# Altium PCB wireTest.PcbDoc (part 1 of 2)
Units mm, origin at the board's own origin, x right, y up, seen from the top; angles counter-clockwise.
Board outline 121.22 x 130.26 mm, 2 copper layers (Top Layer, Bottom Layer); 157 components, 144 nets, 513 pads, 186 vias.
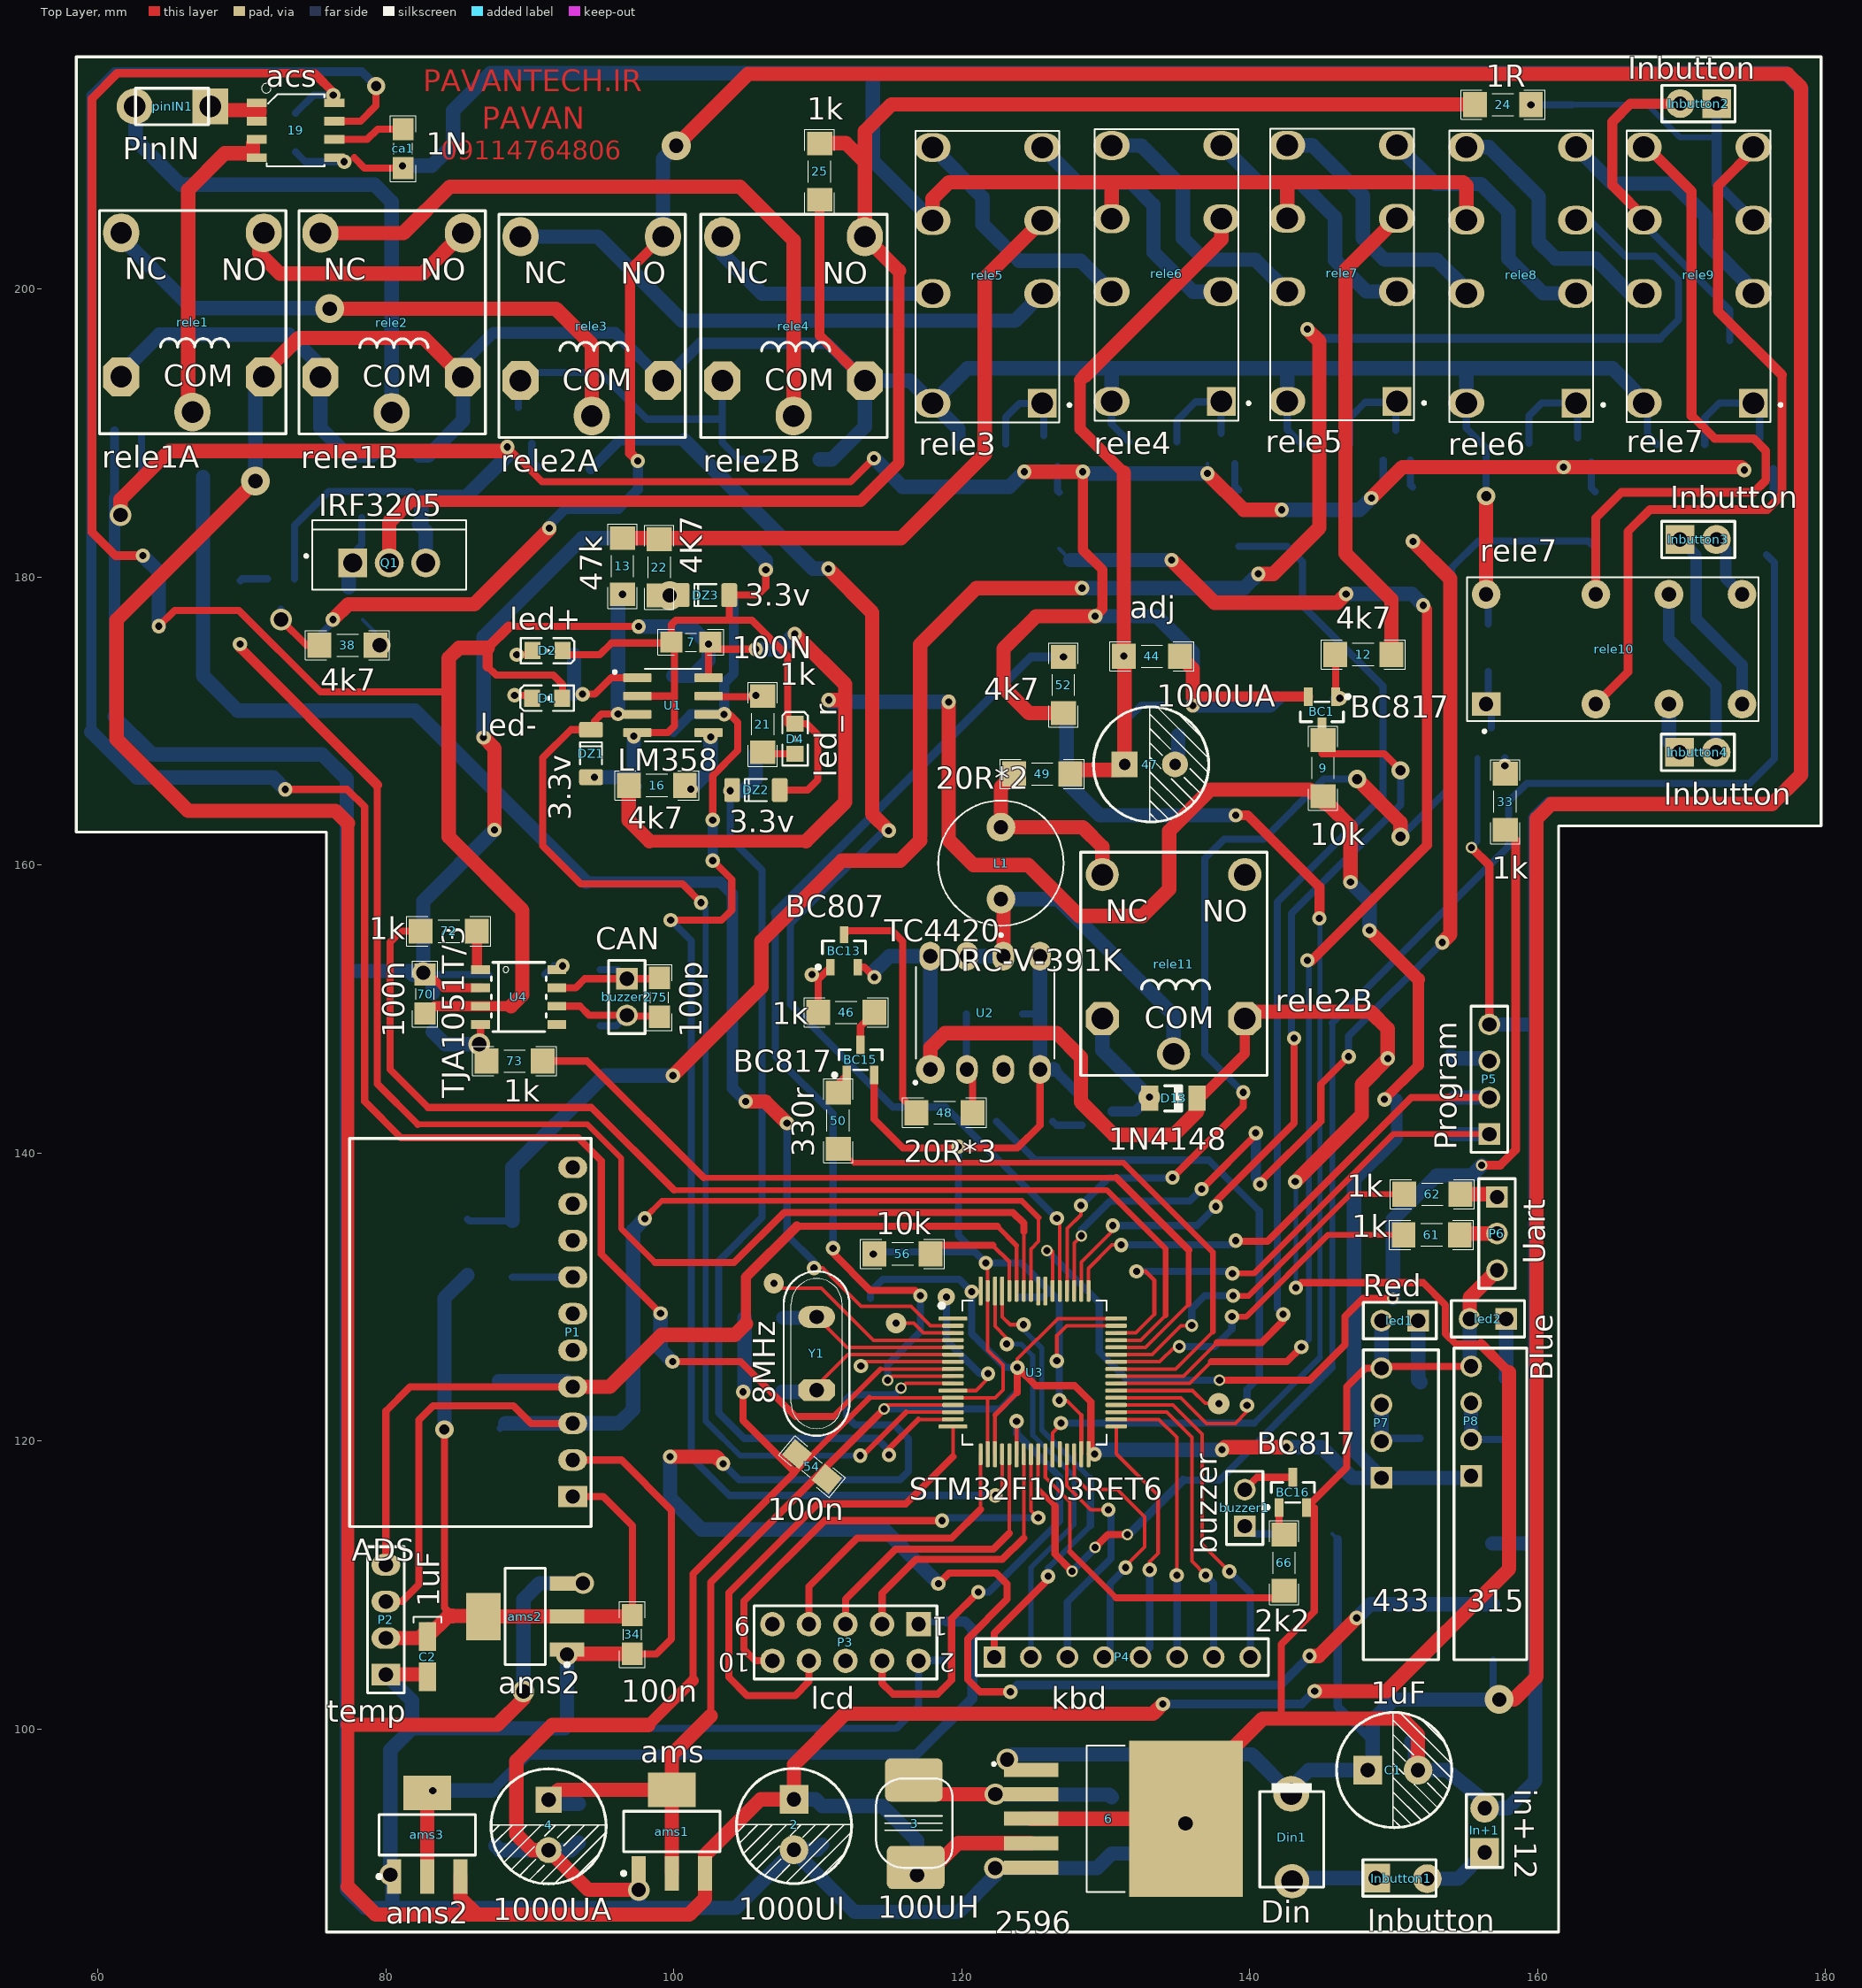
[diagram p0: Top Layer view]
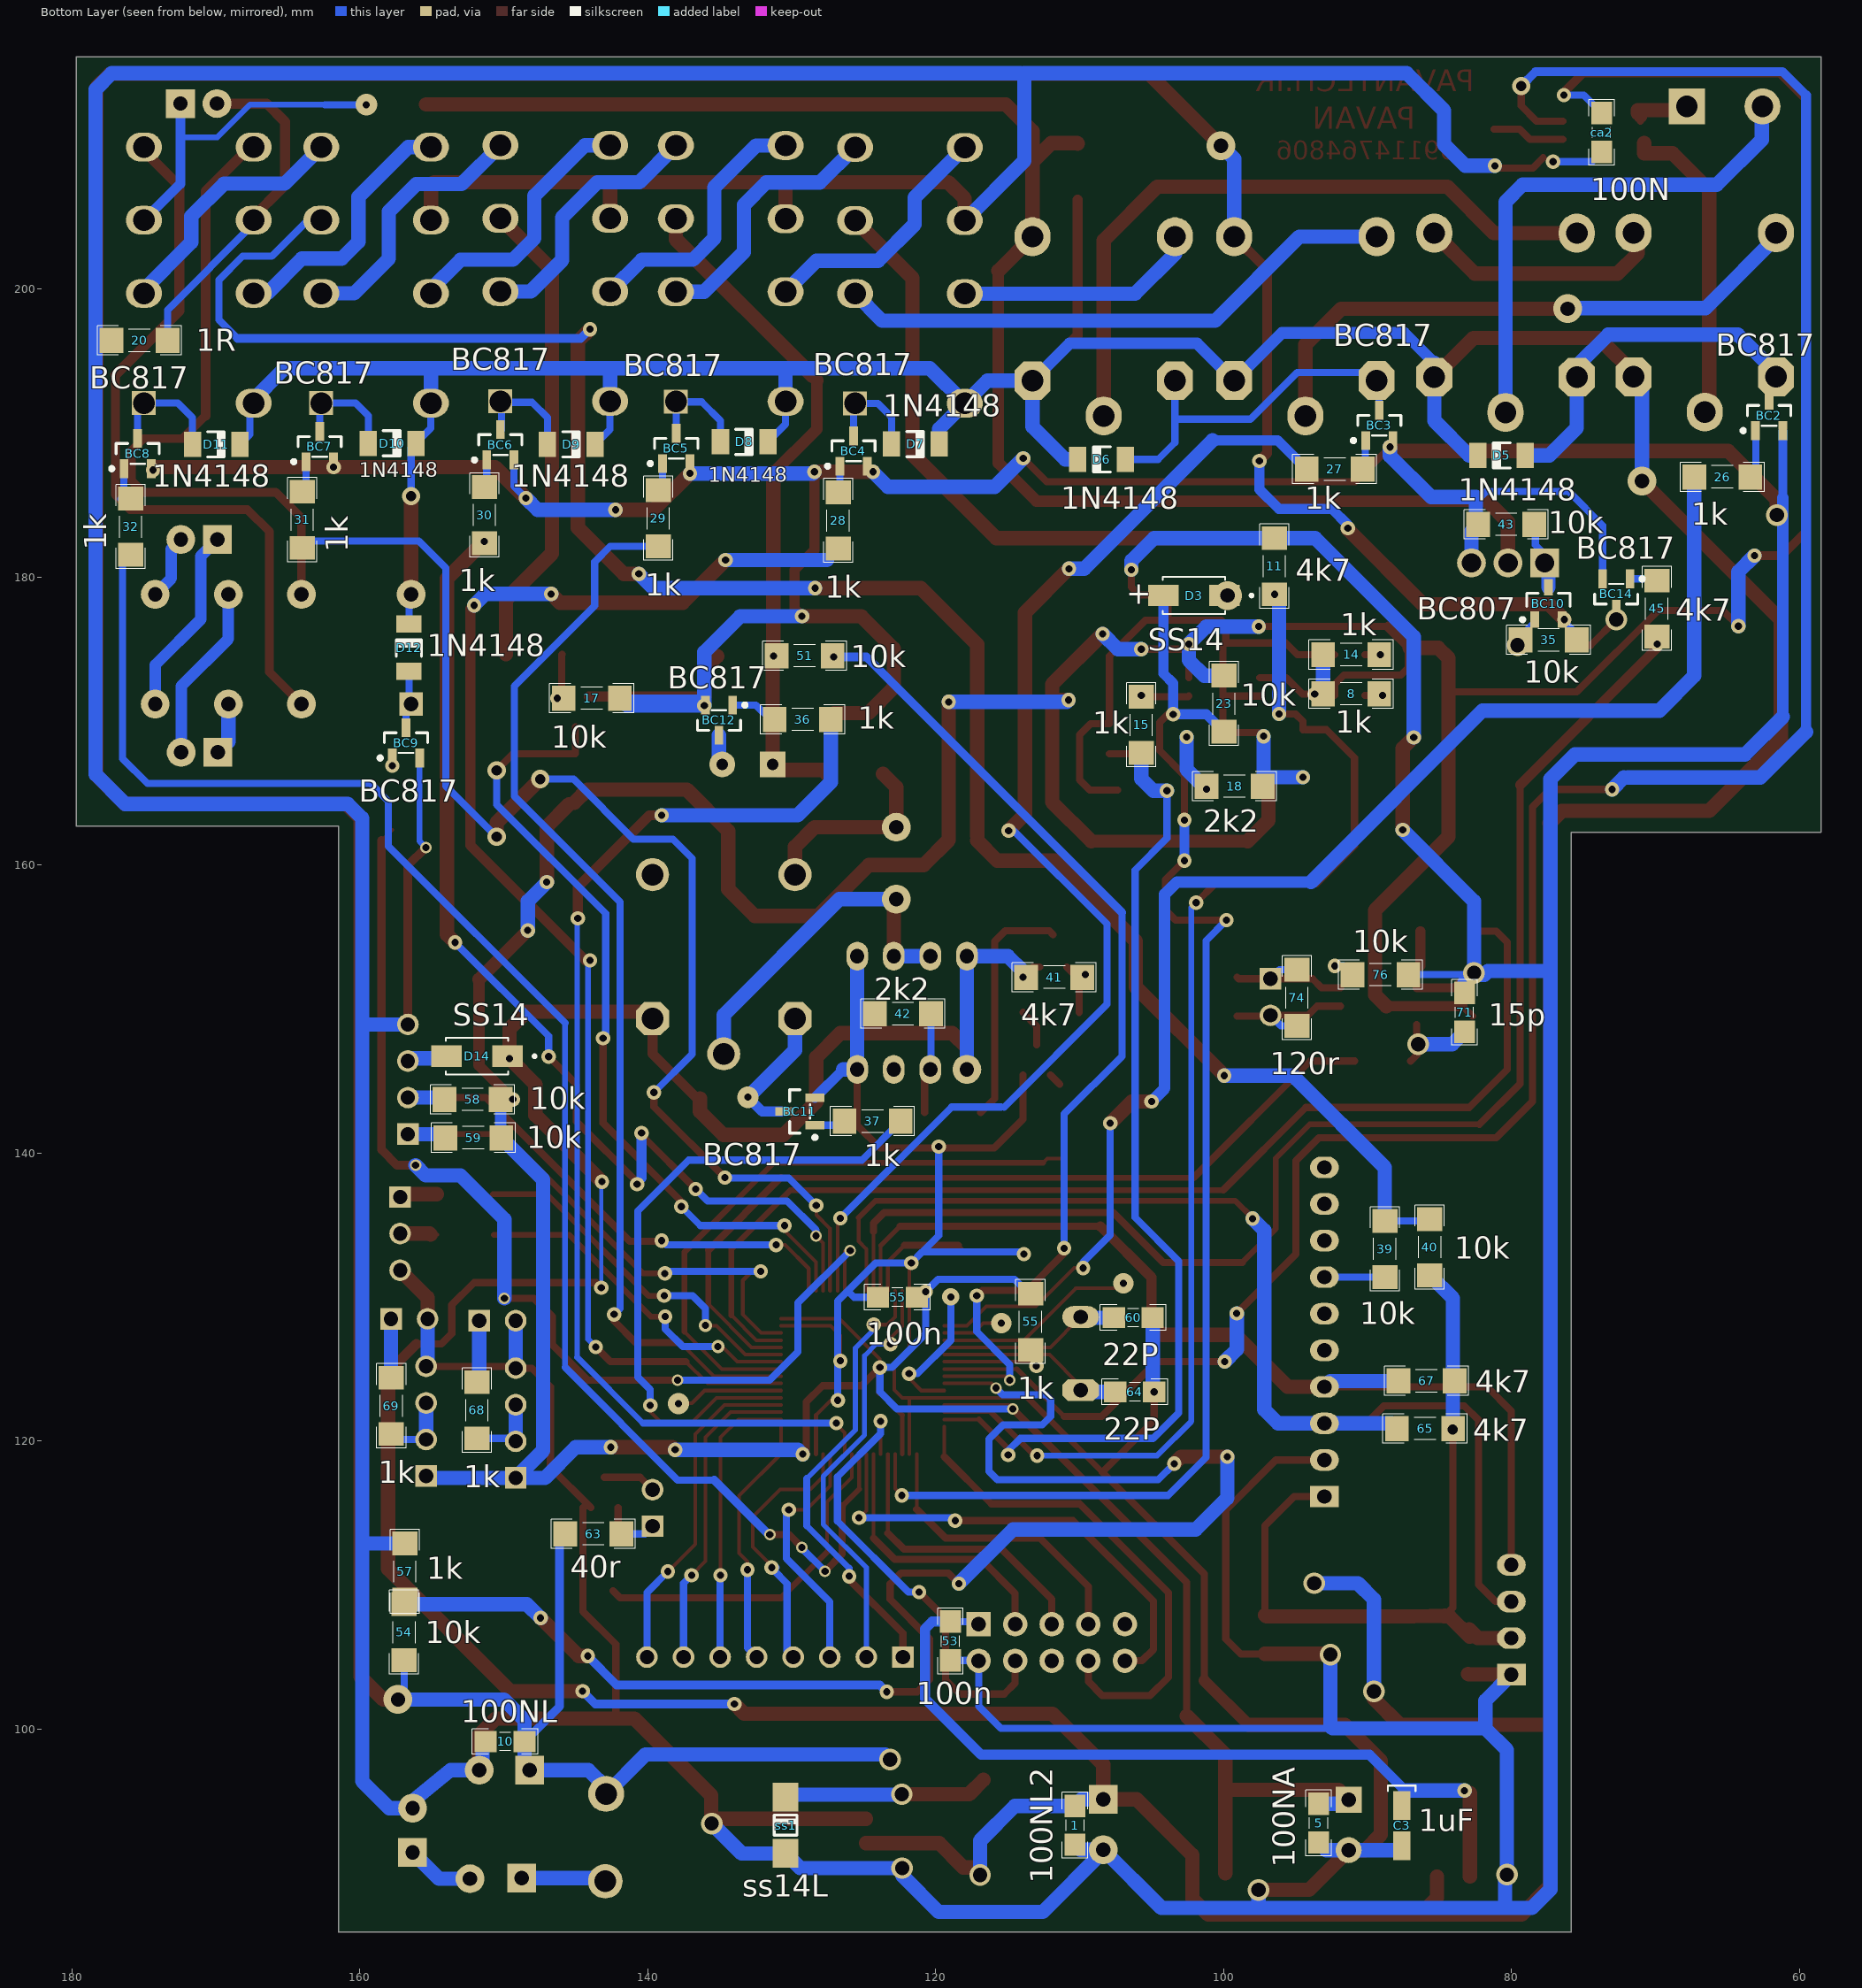
[diagram p1: Bottom Layer view, seen from below]
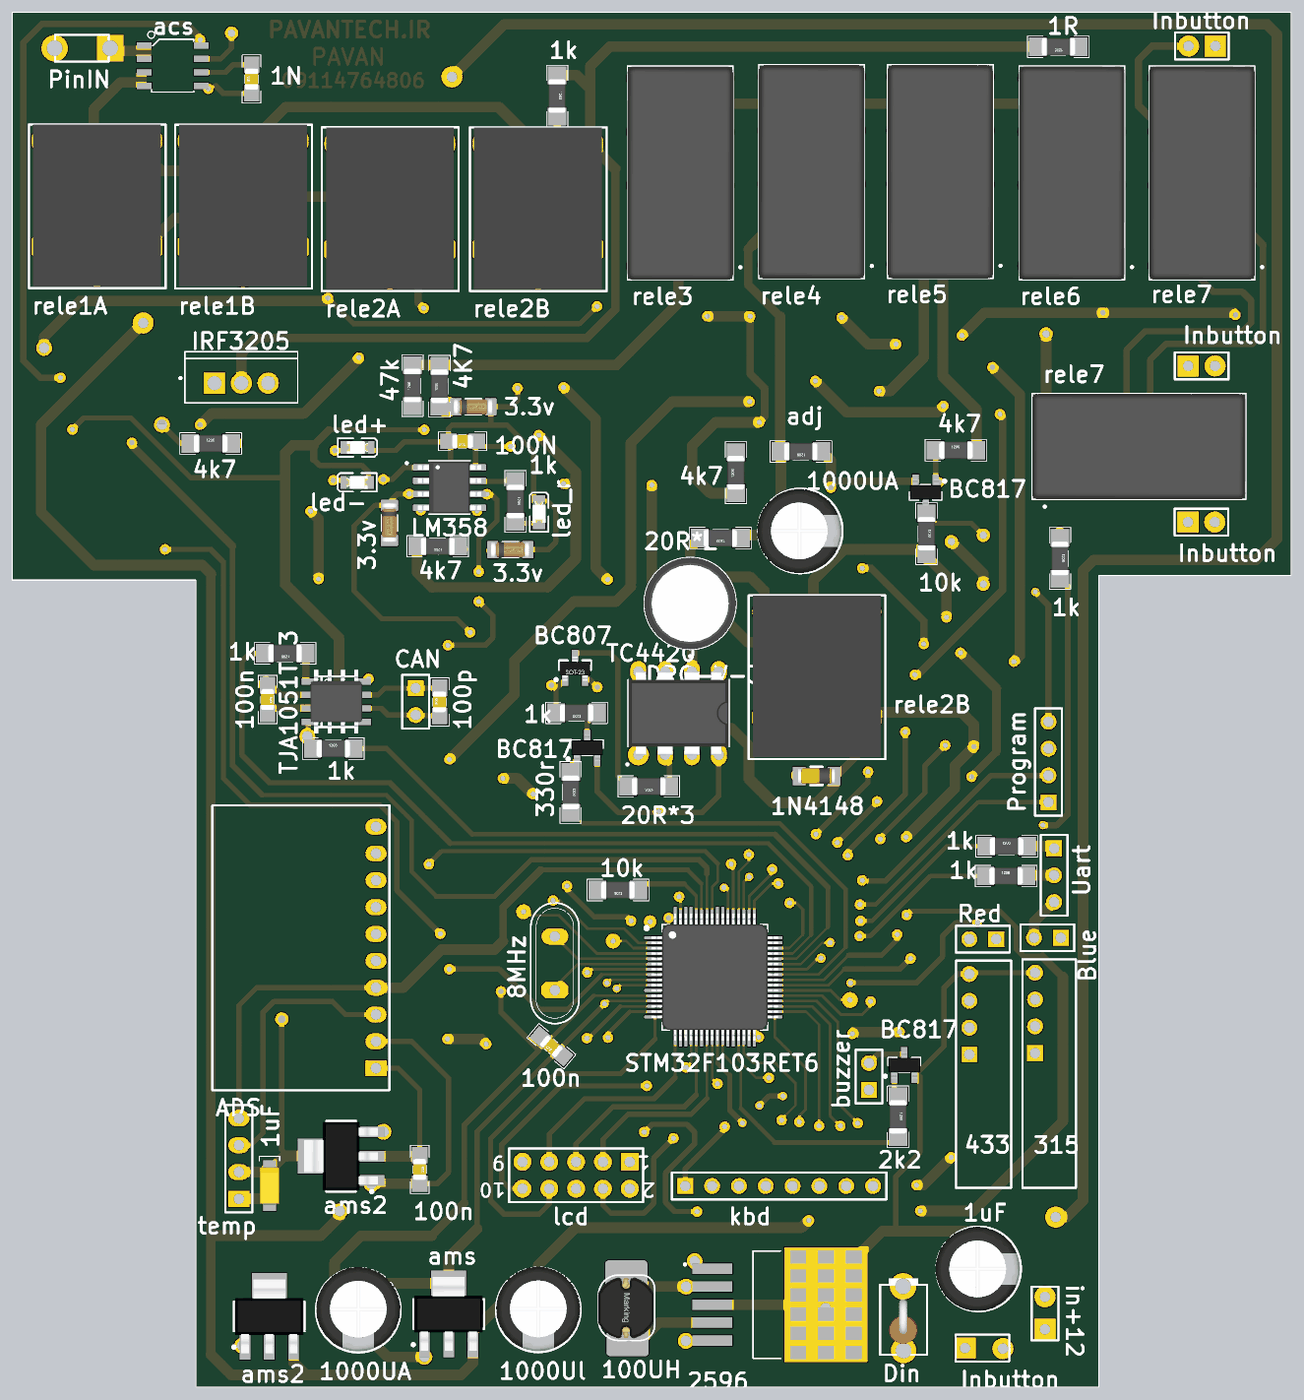
[diagram p3: 3D render of the assembled board from above, using the file's embedded part models]
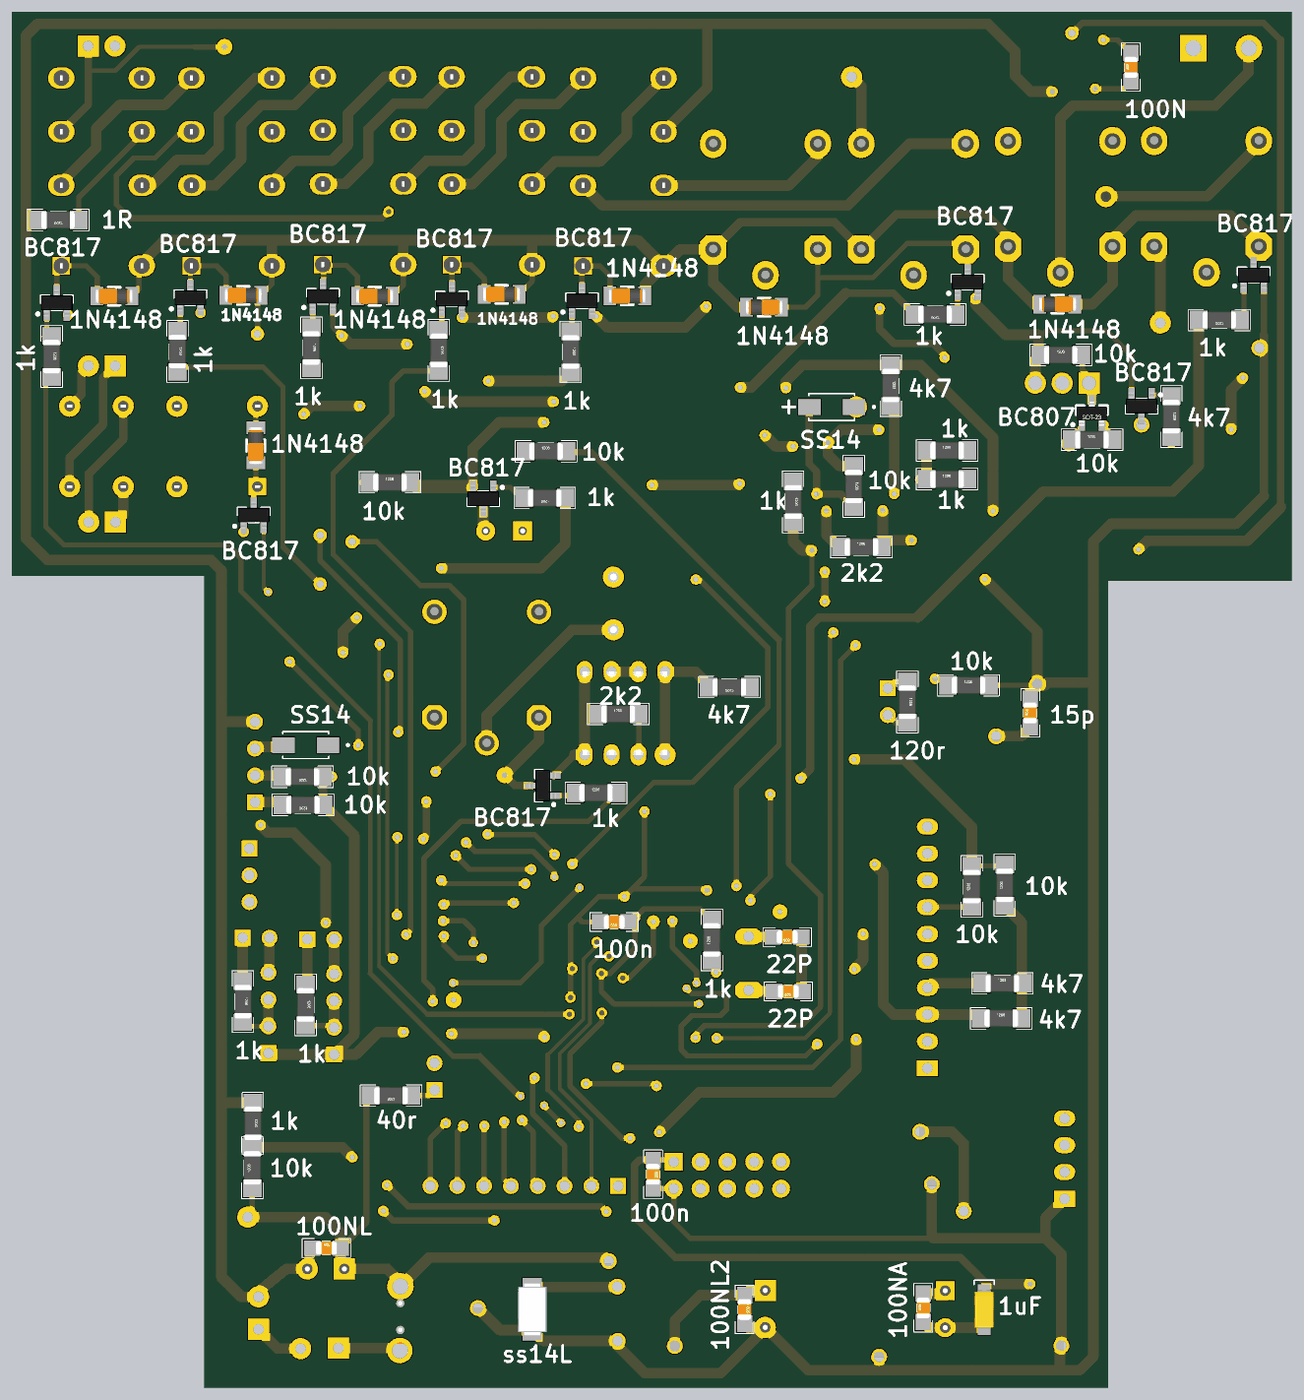
[diagram p4: 3D render of the assembled board from below, using the file's embedded part models]

## Layer stack, top to bottom
Top Solder: solder mask 0.0102, Solder Resist, Dk 3.5
Top Layer: signal copper 0.0356
Dielectric 1: dielectric 0.32, FR-4, Dk 4.8
Bottom Layer: signal copper 0.0356
Bottom Solder: solder mask 0.0102, Solder Resist, Dk 3.5

## Board outline
58.496,162.274 cw(c58.496,162.281) 58.489,162.281 58.489,216.129 cw(c58.496,216.129) 58.496,216.135 179.705,216.135 cw(c179.705,216.129) 179.712,216.129 179.712,162.712 cw(c179.705,162.712) 179.705,162.706 161.475,162.706 161.475,85.877 cw(c161.468,85.877) 161.468,85.871 75.87,85.871 cw(c75.87,85.877) 75.863,85.877 75.863,162.274

## Design rules (kind name [scope] priority, off if disabled: settings)
Clearance [All] p1: gap=0.1 ignorepadtopadclearanceinfootprint=FALSE
PolygonConnect [All] p1: connectstyle=Relief reliefconductorwidth=0.254 reliefentries=4 polygonreliefangle="90 Angle" airgapwidth=0.254
RoutingVias [All] p1: holewidth=0.5 width=1 viastyle="Through Hole" minholewidth=0.5 minwidth=1 maxholewidth=1 maxwidth=1.5 viatemplateguid#1={EFB9FA06-F7A7-452A-BE94-403044DDEC13} viatemplatename#1=v127h71
SolderMaskExpansion [All] p1: expansion=0.102
Width [All] p1: maxlimit=1 minlimit=0.25 preferedwidth=0.5
30 further rules are at their usual default settings.

## Components (designator, comment, footprint, x,y, rotation, side; value= is the part's Value field where it differs from the comment)
1 "100NL2" CAPC3413X12N 110.312,93.294 r270 bottom
2 "1000Ul" "Cap electrolitic radial 8x12-3.5"#1 108.356,93.345 r270 top value=1uF
3 "100UH" "Inductor SMD 3x3.2mm" 116.662,93.447 r270 top value=4µ7
4 "1000UA" "Cap electrolitic radial 8x12-3.5"#2 91.313,93.32 r270 top value=1uF
5 "100NA" CAPC3413X12N 93.396,93.447 r90 bottom
6 "2596" TO170P1524X483-6N 131.242,93.751 r0 top
7 "100N" CAPC3413X12N 101.194,175.463 r180 top
8 "1k" RESC4817X04N 91.135,171.882 r180 bottom
9 "10k" RESC4817X04N 145.11,166.726 r270 top
10 "100NL" CAPC3413X12N 149.911,99.111 r180 bottom
11 "4k7" RESC4817X04N 96.469,180.746 r270 bottom
12 "4k7" RESC4817X04N 147.904,174.625 r0 top
13 "47k" RESC4817X04N 96.444,180.746 r90 top
14 "1k" RESC4817X04N 91.135,174.6 r180 bottom
15 "1k" RESC4817X04N 105.715,169.723 r270 bottom
16 "4k7" RESC4817X04N 98.831,165.532 r180 top
17 "10k" RESC4817X04N 143.891,171.577 r180 bottom
18 "2k2" RESC4817X04N 99.238,165.456 r180 bottom
19 "acs" SOIC8-1.27-5X4MM 73.736,211.023 r270 top
20 "1R" RESC4817X04N 175.311,196.418 r0 bottom
21 "1k" RESC4817X04N 106.197,169.774 r270 top
22 "4K7" RESC4817X04N 99.009,180.67 r90 top
23 "10k" RESC4817X04N 99.974,171.196 r270 bottom
24 "1R" RESC4817X04N 157.607,212.801 r180 top
25 "1k" RESC4817X04N 110.134,208.153 r270 top
26 "1k" RESC4817X04N 65.354,186.944 r0 bottom
27 "1k" RESC4817X04N 92.278,187.477 r0 bottom
28 "1k" RESC4817X04N 126.771,183.921 r270 bottom
29 "1k" RESC4817X04N 139.268,184.074 r270 bottom
30 "1k" RESC4817X04N 151.333,184.302 r270 bottom
31 "1k" RESC4817X04N 164.008,183.972 r270 bottom
32 "1k" RESC4817X04N 175.92,183.49 r270 bottom
33 "1k" RESC4817X04N 157.759,164.389 r270 top
34 "100n" CAPC3413X12N 97.13,106.553 r270 top
35 "10k" RESC4817X04N 77.419,175.616 r180 bottom
36 "1k" RESC4817X04N 129.235,170.104 r0 bottom
37 "1k" RESC4817X04N 124.384,142.189 r180 bottom
38 "4k7" RESC4817X04N 77.343,175.26 r0 top
39 "10k" RESC4817X04N 88.798,133.325 r90 bottom
40 "10k" RESC4817X04N 85.674,133.452 r90 bottom
41 "4k7" RESC4817X04N 111.76,152.197 r0 bottom
42 "2k2" RESC4817X04N 122.276,149.657 r180 bottom
43 "10k" RESC4817X04N 80.366,183.642 r180 bottom
44 "adj" RESC4817X04N 133.223,174.498 r180 top
45 "4k7" RESC4817X04N 69.901,177.8 r270 bottom
46 "1k" RESC4817X04N 111.989,149.758 r180 top
47 "1000UA" "Cap electrolitic radial 8x12-3.5"#3 133.073,166.98 r0 top value=1uF
48 "20R*3" RESC4817X04N 118.821,142.799 r180 top
49 "20R*2" RESC4817X04N 125.603,166.319 r180 top
50 "330r" RESC4817X04N 111.43,142.24 r270 top
51 "10k" RESC4817X04N 129.108,174.523 r180 bottom
52 "4k7" RESC4817X04N 127.076,172.497 r90 top
53 "100n" CAPC3413X12N 118.974,106.096 r270 bottom
54 "100n" CAPC3413X12N 109.601,118.212 r140 top
54 "10k" RESC4817X04N 156.921,106.705 r90 bottom
55 "100n" CAPC3413X12N 122.657,129.972 r0 bottom
55 "1k" RESC4817X04N 113.411,128.27 r90 bottom
56 "10k" RESC4817X04N 115.9,132.994 r180 top
57 "1k" RESC4817X04N 156.87,110.922 r270 bottom
58 "10k" RESC4817X04N 152.171,143.713 r0 bottom
59 "10k" RESC4817X04N 152.121,141.046 r0 bottom
60 "22P" CAPC3413X12N 106.274,128.549 r0 bottom
61 "1k" RESC4817X04N 152.654,134.315 r0 top
62 "1k" RESC4817X04N 152.705,137.135 r0 top
63 "40r" RESC4817X04N 143.784,113.538 r0 bottom
64 "22P" CAPC3413X12N 106.172,123.393 r0 bottom
65 "4k7" RESC4817X04N 86.004,120.853 r180 bottom
66 "2k2" RESC4817X04N 142.418,111.531 r270 top
67 "4k7" RESC4817X04N 85.903,124.155 r180 bottom
68 "1k" RESC4817X04N 151.867,122.123 r270 bottom
69 "1k" RESC4817X04N 157.81,122.428 r270 bottom
70 "100n" CAPC3413X12N 82.728,151.028 r270 top
71 "15p" CAPC3413X12N 83.261,149.758 r90 bottom
72 "1k" RESC4817X04N 84.379,155.397 r180 top
73 "1k" RESC4817X04N 88.951,146.38 r0 top
74 "120r" RESC4817X04N 94.894,150.774 r270 bottom
75 "100p" CAPC3413X12N 99.009,150.8 r90 top
76 "10k" RESC4817X04N 89.103,152.375 r180 bottom
ams1 "ams" MP04A_N 99.873,92.862 r90 top
ams2 "ams2" MP04A_N 89.687,107.798 r180 top
ams3 "ams2" MP04A_N 82.88,92.634 r90 top
BC1 "BC817" SOT23_N 145.034,170.637 r270 top
BC2 "BC817" SOT23_N 62.103,191.211 r90 bottom
BC3 "BC817" SOT23_N 89.179,190.525 r90 bottom
BC4 "BC817" SOT23_N 125.705,188.747 r90 bottom
BC5 "BC817" SOT23_N 138.024,188.925 r90 bottom
BC6 "BC817" SOT23_N 150.241,189.179 r90 bottom
BC7 "BC817" SOT23_N 162.789,189.052 r90 bottom
BC8 "BC817" SOT23_N 175.438,188.57 r90 bottom
BC9 "BC817" SOT23_N 156.794,168.478 r90 bottom
BC10 "BC807" SOT23_BEC_N 77.434,178.163 r90 bottom
BC11 "BC817" SOT23_N 129.438,142.875 r0 bottom
BC12 "BC817" SOT23_N 135.052,170.053 r270 bottom
BC13 "BC807" SOT23_BEC_N 111.836,154.026 r90 top
BC14 "BC817" SOT23_N 72.72,178.816 r270 bottom
BC15 "BC817" SOT23_N 112.979,146.456 r90 top
BC16 "BC817" SOT23_N 143.012,116.417 r90 top
buzzer1 "buzzer" HDR1X2#1 139.67,114.071 r90 top
buzzer2 "CAN" HDR1X2#1 96.749,152.095 r270 top
C1 "1uF" "Cap electrolitic radial 8x12-3.5"#1 149.959,97.13 r0 top
C2 "1uF" "Cap1206_(3216X18L)Size A" 82.906,106.401 r270 top
C3 "1uF" "Cap1206_(3216X18L)Size A" 87.63,94.671 r270 bottom
ca1 "1N" CAPC3413X12N 81.204,209.753 r90 top
ca2 "100N" CAPC3413X12N 73.736,210.871 r90 bottom
D1 "led-" LED_SMD_0805 91.211,171.577 r0 top
D2 "led+" LED_SMD_0805 91.237,174.879 r180 top
D3 "SS14" DIOM4325X250N 102.057,178.714 r0 bottom
D4 "led_r" LED_SMD_0805 108.433,168.758 r270 top
D5 "1N4148" "Diode 1n4148 SMD" 79.045,188.443 r0 bottom
D6 "1N4148" "Diode 1n4148 SMD" 106.832,188.163 r0 bottom
D7 "1N4148" "Diode 1n4148 SMD" 123.061,189.23 r180 bottom
D8 "1N4148" "Diode 1n4148 SMD" 134.95,189.382 r180 bottom
D9 "1N4148" "Diode 1n4148 SMD" 146.964,189.205 r180 bottom
D10 "1N4148" "Diode 1n4148 SMD" 159.41,189.281 r180 bottom
D11 "1N4148" "Diode 1n4148 SMD" 171.628,189.205 r180 bottom
D12 "1N4148" "Diode 1n4148 SMD" 156.591,173.433 r90 bottom
D13 "1N4148" "Diode 1n4148 SMD" 133.071,143.789 r0 top
D14 "SS14" DIOM4325X250N 151.867,146.71 r0 bottom
Din1 "Din" "Diode 1W Stand" 142.926,92.634 r90 top
DZ1 "3.3v" "SOD80, LL-34" 94.259,167.742 r270 top value=12V
DZ2 "3.3v" "SOD80, LL-34" 105.715,165.202 r0 top value=12V
DZ3 "3.3v" "SOD80, LL-34" 102.21,178.74 r0 top value=12V
In+1 "in+12" HDR1X2#2 156.337,91.643 r90 top
Inbutton1 "Inbutton" HDR1X2#3 149.149,89.637 r0 top
Inbutton2 "Inbutton" HDR1X2#4 172.466,212.877 r180 top
Inbutton3 "Inbutton" HDR1X2#4 169.901,182.601 r0 top
Inbutton4 "Inbutton" HDR1X2#4 169.875,167.818 r0 top
L1 "DRC-V-391K" IND_DRC-V-391K 122.733,160.122 r90 top
led1 "Red" HDR1X2#1 151.714,128.346 r180 top
led2 "Blue" HDR1X2#1 157.836,128.473 r180 top
P1 "ADS" HDR1X10 92.989,116.129 r90 top
P2 "temp" HDR1X4#1 80.01,103.759 r90 top
P3 "lcd" HDR2X5 117.018,107.264 r180 top
P4 "kbd" HDR1X8 122.276,104.978 r0 top
P5 "Program" HDR1X4#2 156.667,141.3 r90 top
P6 "Uart" HDR1X3 157.201,136.931 r270 top
P7 "433" HDR1X4#2 149.174,117.424 r90 top
P8 "315" HDR1X4#2 155.397,117.551 r90 top
pinIN1 "PinIN" HDR1X2#5 66.421,212.674 r180 top
Q1 "IRF3205" TO254P1067X483X3124-3P 77.699,180.975 r0 top
rele1 "rele1A" "Relay 15.40x12.10x13.10"#1 66.57,191.454 r0 top
rele2 "rele1B" "Relay 15.40x12.10x13.10"#1 80.413,191.428 r0 top
rele3 "rele2A" "Relay 15.40x12.10x13.10"#1 94.31,191.186 r0 top
rele4 "rele2B" "Relay 15.40x12.10x13.10"#1 108.328,191.182 r0 top
rele5 "rele3" RELAY_9-1393792-3#1 121.793,200.838 r90 top
rele6 "rele4" RELAY_9-1393792-3#1 134.239,200.965 r90 top
rele7 "rele5" RELAY_9-1393792-3#1 146.431,200.982 r90 top
rele8 "rele6" RELAY_9-1393792-3#1 158.877,200.855 r90 top
rele9 "rele7" RELAY_9-1393792-3#1 171.196,200.855 r90 top
rele10 "rele7" RELAY_9-1393792-3#2 165.219,174.981 r0 top
rele11 "rele2B" "Relay 15.40x12.10x13.10"#2 134.725,146.877 r0 top
ss1 "ss14L" "Diode 1N4007 SMD" 130.429,91.338 r90 bottom
U1 "LM358" SOIC127P599X175-8N 99.949,171.094 r0 top
U2 "TC4420" DIP787W46P254L927H533Q8 121.641,149.733 r90 top
U3 "STM32F103RET6" QFP50P1200X1200X160-64N 125.07,124.739 r0 top
U4 "TJA1051T/3" SOT96-1 89.23,150.825 r270 top
Y1 "8MHz" My_Crystal 109.931,126.06 r90 top

## Footprints (in the part's own frame and the unit in brackets; to place one, negate y for a bottom-side part, rotate by r counter-clockwise, add the part's x,y. Pads: shape width x height; smd on the part's side, far side on the other; paste and mask are expansions set on the pad)
"Cap1206_(3216X18L)Size A" [mm] "Chip Capacitor, 2-Leads, Body 3.2x1.6mm, IPC High Density, chip Tantalum"
  rect 1.999x1.199 smd: 1(0,0) 2(2.8,0)
  silkscreen extent -1.38,-0.97 -0.99,0.97, body extent -0.43,-0.9 3.21,0.9, height 1.8
"Cap electrolitic radial 8x12-3.5"#1 [mm] "Cap electrolitic radial 8x12-3.5-Design:Abbas Basereh"
  rect 2x2 hole 1: 1(-1.75,0)
  round 2 hole 1: 2(1.75,0)
  silkscreen extent -3.9,-4 4.1,4, body extent -4,-4 4,4, height 12.3
"Cap electrolitic radial 8x12-3.5"#2 [mm] "Cap electrolitic radial 8x12-3.5-Design:Abbas Basereh"
  rect 1.8x1.8 hole 1: 1(-1.75,0)
  round 1.8 hole 1: 2(1.75,0)
  silkscreen extent -3.9,-4 4.1,4, body extent -4,-4 4,4, height 12.3
"Cap electrolitic radial 8x12-3.5"#3 [mm] "Cap electrolitic radial 8x12-3.5-Design:Abbas Basereh"
  rect 1.8x1.8 hole 0.8: 1(-1.75,0)
  round 1.8 hole 0.8: 2(1.75,0)
  silkscreen extent -3.9,-4 4.1,4, body extent -4,-4 4,4, height 12.3
CAPC3413X12N [mm] "Chip Capacitor, 2-Leads, Body 3/40x1/30mm, IPC Medium Density-Design:Abbas Basereh"
  rect 1.55x1.45 smd: 1(-1.35,0) 2(1.35,0)
  silkscreen extent -2.29,-0.89 2.29,0.89, body extent -1,-0.63 1,0.62, height 0.78
"Diode 1N4007 SMD" [mm] "DO-214AC 1N4001-4007"
  rect 2x1.8 smd: 1(0,0) 2(3.92,0)
  silkscreen extent 1.27,-0.81 2.67,0.83, body extent -0.54,-1.36 4.46,1.34, height 2.16
"Diode 1n4148 SMD" [mm] "Mini MELF SOD-80"
  rect 1.2x1.75 smd: 1(0,0) 2(3.3,0)
  silkscreen extent 1.04,-0.87 2.22,0.87, body extent -0.13,-0.75 3.37,0.75, height 1.55
"Diode 1W Stand" [mm]
  round 2.4 hole 1.5: 1(-3.226,-0.025)
  round 2.5 hole 1.5: 2(2.845,0.025)
  silkscreen extent -3.63,-2.24 3.58,2.21, body extent -2.62,-1.32 1.65,1.35, height 7.39
DIOM4325X250N [mm]
  rect 2.12x1.5 smd: A(2.115,0) C(-2.115,0)
  silkscreen extent -4.1,-1.28 2.16,1.28
DIP787W46P254L927H533Q8 [mm]
  round 2 hole 1: 1(-3.935,3.81)
  oval 2x1.5 hole 1: 2(-3.935,1.27) 3(-3.935,-1.27) 4(-3.935,-3.81) 5(3.935,-3.81) 6(3.935,-1.27) 7(3.935,1.27) 8(3.935,3.81)
  silkscreen extent -4.95,-4.8 3.18,4.95, body extent -3.96,-4.75 3.96,4.75, height 5.08
HDR1X2#1 [mm] "Connector; Header; 2 Position"
  rect 1.5x1.5 hole 1: 1(0,0)
  round 1.5 hole 1: 2(2.54,0)
  silkscreen extent -1.27,-1.27 3.81,1.27
HDR1X2#2 [mm] "Connector; Header; 2 Position"
  rect 2x2 hole 1: 1(-0.229,0)
  round 2 hole 1: 2(2.845,0)
  silkscreen extent -1.27,-1.27 3.81,1.27
HDR1X2#3 [mm] "Connector; Header; 2 Position"
  rect 2x2 hole 1: 1(-0.381,0)
  round 2 hole 1: 2(3.2,-0.051)
  silkscreen extent -1.27,-1.27 3.81,1.27
HDR1X2#4 [mm] "Connector; Header; 2 Position"
  rect 2x2 hole 1: 1(0,0)
  round 2 hole 1: 2(2.54,0)
  silkscreen extent -1.27,-1.27 3.81,1.27
HDR1X2#5 [mm] "Connector; Header; 2 Position"
  rect 2.5x2.5 hole 1.5: 1(-1.397,0)
  round 2.5 hole 1.5: 2(3.861,0)
  silkscreen extent -1.27,-1.27 3.81,1.27
HDR1X3 [mm] "Connector; Header; 3 Position"
  rect 1.5x1.5 hole 1: 1(0,0)
  round 1.5 hole 1: 2(2.54,0) 3(5.08,0)
  silkscreen extent -1.27,-1.27 6.35,1.27
HDR1X4#1 [mm] "Connector; Header; 4 Position"
  rect 1.5x2 hole 1: 1(0,0)
  oval 1.5x2 hole 1: 2(2.54,0) 3(5.08,0) 4(7.62,0)
  silkscreen extent -1.27,-1.27 8.89,1.27
HDR1X4#2 [mm] "Connector; Header; 4 Position"
  rect 1.5x1.5 hole 1: 1(0,0)
  round 1.5 hole 1: 2(2.54,0) 3(5.08,0) 4(7.62,0)
  silkscreen extent -1.27,-1.27 8.89,1.27
HDR1X8 [mm] "Connector; Header; 8 Position"
  rect 1.5x1.5 hole 1: 1(0,0)
  round 1.5 hole 1: 2(2.54,0) 3(5.08,0) 4(7.62,0) 5(10.16,0) 6(12.7,0) 7(15.24,0) 8(17.78,0)
  silkscreen extent -1.27,-1.27 19.05,1.27
HDR1X10 [mm] "Connector; Header; 10 Position"
  rect 1.5x2 hole 1: 1(0,0)
  oval 1.5x2 hole 1: 2(2.54,0) 3(5.08,0) 4(7.62,0) 5(10.16,0) 6(12.7,0) 7(15.24,0) 8(17.78,0) 9(20.32,0) 10(22.86,0)
  silkscreen extent -2.08,-1.27 24.87,15.49
HDR2X5 [mm] "Connector; Header; 5x2 Position"
  rect 1.7x1.7 hole 1: 1(0,0)
  round 1.7 hole 1: 2(0,2.54) 3(2.54,0) 4(2.54,2.54) 5(5.08,0) 6(5.08,2.54) 7(7.62,0) 8(7.62,2.54) 9(10.16,0) 10(10.16,2.54)
  silkscreen extent -1.27,-1.27 11.43,3.81
IND_DRC-V-391K [mm]
  round 2 hole 1: 1(-2.5,0) 2(2.5,0)
  silkscreen extent -5.1,-4.35 4.35,4.35, body extent -4.35,-4.35 4.35,4.35, height 12.5
"Inductor SMD 3x3.2mm" [mil] "Inductor 4.7µH SMD 3x3.2mm"
  round 20 on Mech15: 0(0,0)
  rrect25% 118.11x157.48 smd: 1(-118,1) 2(121,6)
  silkscreen extent -122,-102 122,106, body extent -114,-102 114,102, height 177
LED_SMD_0805 [mm] "SMD Mono-color Chip LED, body 2.0x1.25mm"
  rect 1.1x1.2 smd: 1(-1.05,0) 2(1.05,0)
  silkscreen extent -1.85,-0.88 1.85,0.88, body extent -1,-0.62 1,0.63, height 0.7
MP04A_N [mm] "SOT223, 4-Leads, Body 6.5x3.5mm, Pitch 2.3mm, Lead Span 7mm, IPC Medium Density"
  rect 2.4x1 smd: 1(-2.9,2.3) 2(-2.9,0) 3(-2.9,-2.3)
  rect 2.4x3.3 smd: 4(2.9,0)
  silkscreen extent -3.02,-3.35 1.4,3.47, body extent -3.49,-3.24 3.49,3.24, height 1.64
My_Crystal [mm]
  oct 1.524x2.54 hole 1: 1(-2.54,0)
  oval 1.524x2.54 hole 1: 2(2.54,0)
  silkscreen extent -5.71,-2.29 5.71,2.29
QFP50P1200X1200X160-64N [mm]
  rrect50% 2x0.28 smd: 1(-5.67,3.75) 11(-5.67,-1.25) 16(-5.67,-3.75)
  rrect50% 1.49x0.28 smd: 2(-5.67,3.25) 3(-5.67,2.75) 4(-5.67,2.25) 5(-5.67,1.75) 6(-5.67,1.25) 7(-5.67,0.75) 8(-5.67,0.25) 9(-5.67,-0.25) 10(-5.67,-0.75) 12(-5.67,-1.75) 13(-5.67,-2.25) 14(-5.67,-2.75) 15(-5.67,-3.25) 33(5.67,-3.75) 34(5.67,-3.25) 35(5.67,-2.75) 36(5.67,-2.25) 37(5.67,-1.75) 38(5.67,-1.25) 39(5.67,-0.75) 40(5.67,-0.25) 41(5.67,0.25) 42(5.67,0.75) 43(5.67,1.25) 44(5.67,1.75) 45(5.67,2.25) 46(5.67,2.75) 47(5.67,3.25) 48(5.67,3.75)
  rrect50% 0.28x1.49 smd: 17(-3.75,-5.67) 20(-2.25,-5.67) 21(-1.75,-5.67) 23(-0.75,-5.67) 24(-0.25,-5.67) 25(0.25,-5.67) 26(0.75,-5.67) 29(2.25,-5.67) 30(2.75,-5.67) 49(3.75,5.67) 50(3.25,5.67) 51(2.75,5.67) 52(2.25,5.67) 53(1.75,5.67) 54(1.25,5.67) 57(-0.25,5.67) 58(-0.75,5.67) 59(-1.25,5.67) 60(-1.75,5.67) 63(-3.25,5.67)
  rrect50% 0.28x1.8 smd: 18(-3.25,-5.67) 19(-2.75,-5.67) 22(-1.25,-5.67) 27(1.25,-5.67) 28(1.75,-5.67) 31(3.25,-5.67) 32(3.75,-5.67)
  rrect50% 0.28x2 smd: 55(0.75,5.67) 56(0.25,5.67) 61(-2.25,5.67) 62(-2.75,5.67) 64(-3.75,5.67)
  silkscreen extent -6.6,-5 5,5, body extent -6,-6 6,6, height 1.6
"Relay 15.40x12.10x13.10"#1 [mm]
  oval 2.5x2.7 hole 1.5: 1(0,0) 2(-4.95,12.45) 3(4.95,12.45)
  oct 2.5x2.7 hole 1.5: 4(-4.95,2.45) 5(4.95,2.45)
  silkscreen extent -6.45,-1.5 6.5,14, body extent -6.05,-1.3 6.05,14, height 16.1
"Relay 15.40x12.10x13.10"#2 [mm]
  round 2.3 hole 1.5: 1(0,0) 2(-4.95,12.45) 3(4.95,12.45)
  oct 2.3x2.3 hole 1.5: 4(-4.95,2.45) 5(4.95,2.45)
  silkscreen extent -6.45,-1.5 6.5,14, body extent -6.05,-1.3 6.05,14, height 16.1
RELAY_9-1393792-3#1 [mm]
  rect 2x2 / inner round 1.65 / far side rect 1.65x1.65 hole 1.5: 1(-8.78,-3.81)
  oval 2x2.5 hole 1.5: 4(-1.16,-3.81) 6(3.92,-3.81) 8(9,-3.81) 9(9,3.81) 11(3.92,3.81) 13(-1.16,3.81) 16(-8.78,3.81)
  silkscreen extent -10.1,-5.8 10.14,5, body extent -10.1,-5 10.1,5, height 10.9
RELAY_9-1393792-3#2 [mm]
  rect 2x1.65 / inner oval 2x1.65 / far side rect 1.65x1.65 hole 1: 1(-8.78,-3.81)
  round 2 hole 1: 4(-1.16,-3.81) 6(3.92,-3.81) 8(9,-3.81) 9(9,3.81) 11(3.92,3.81) 13(-1.16,3.81) 16(-8.78,3.81)
  silkscreen extent -10.1,-5.8 10.14,5, body extent -10.1,-5 10.1,5, height 10.9
RESC4817X04N [mm] "Chip Resistor, 2-Leads, Body 4/80x1/70mm, IPC Medium Density-Design:Abbas Basereh"
  rect 1.65x1.75 smd: 1(-1.95,0) 2(1.95,0)
  silkscreen extent -2.92,-1.02 2.92,1.02, body extent -1.6,-0.8 1.6,0.8, height 1
"SOD80, LL-34" [mm] "Diode, MiniMELF"
  round 0.5 on Mech15: 0(0,0)
  rrect25% 1.1x1.65 smd: 1(1.65,0) 2(-1.65,0)
  silkscreen extent -0.76,-0.76 0.76,0.76, body extent -1.88,-0.8 1.82,0.8, height 1.6
SOIC8-1.27-5X4MM [mm]
  rect 0.6x1.4 smd: 1(-1.905,-2.7) 2(-0.635,-2.7) 3(0.635,-2.7) 4(1.905,-2.7) 5(1.905,2.7) 6(0.635,2.7) 7(-0.635,2.7) 8(-1.905,2.7)
  silkscreen extent -3.25,-2.36 2.5,2
SOIC127P599X175-8N [mm]
  rrect25% 1.97x0.6 smd: 1(-2.47,1.905) 2(-2.47,0.635) 3(-2.47,-0.635) 4(-2.47,-1.905) 5(2.47,-1.905) 6(2.47,-0.635) 7(2.47,0.635) 8(2.47,1.905)
  silkscreen extent -4.14,-2.52 1.95,2.52, body extent -3,-2.45 3,2.45, height 1.75
SOT23_BEC_N [mm] "SOT23, 3-Leads, Body 2.9x1.3mm, Pitch 0.95mm, Lead Span 2.4mm, IPC Medium Density"
  rect 1.15x0.6 smd: 1(-1.125,0.95) 2(-1.125,-0.95) 3(1.125,0)
  silkscreen extent -1.25,-1.5 0.7,1.93, body extent -1.23,-1.45 1.07,1.45, height 1
SOT23_N [mm] "SOT23, 3-Leads, Body 2.9x1.3mm, Pitch 0.95mm, Lead Span 2.3mm, IPC Medium Density"
  rect 1.3x0.6 smd: 1(-1.05,0.95) 2(-1.05,-0.95) 3(1.05,0)
  silkscreen extent -1.17,-1.5 0.7,1.93, body extent -1.27,-1.5 1.27,1.5, height 1.1
SOT96-1 [mm]
  rect 0.6x1.3 smd: 1(-1.905,-2.65) 2(-0.635,-2.65) 3(0.635,-2.65) 4(1.905,-2.65) 5(1.905,2.65) 6(0.635,2.65) 7(-0.635,2.65) 8(-1.905,2.65)
  silkscreen extent -2.4,-1.9 2.4,1.91, body extent -3,-2.45 3,2.45, height 1.75
TO170P1524X483-6N [mm]
  rect 3.79x0.99 smd: 1(-6.4,3.4) 2(-6.4,1.7) 3(-6.4,0) 4(-6.4,-1.7) 5(-6.4,-3.4)
  rect 7.88x10.84 smd paste-6: 6(4.35,0)
  silkscreen extent -9.1,-5.08 0.09,5.08
TO254P1067X483X3124-3P [mm]
  rect 2.01x2.01 hole 1.34: 1(0,0)
  round 2.01 hole 1.34: 2(2.54,0) 3(5.08,0)
  silkscreen extent -3.33,-1.87 7.88,2.96

## Part data
1 5 7 10 34 53 54 55 60 64 70 71 75 ca1 ca2: library part "CAP SMD 0805", "CAP 0805", Data=16-12-2016, Desc.="CAP SMD 0805", Designer="Abbas Basereh"
2 4 47 C1 C2 C3: library part "Cap ELECTROLITIC TOTAL SIZE", "Cap electrolitic radial", Data=16-12-2016, Designer="Abbas Basereh"
3: library part "Inductor 4.7µH SMD 3x3.2mm", "Inductor 4.7µH SMD 3x3.2mm", Operating Temperature="-40°C ~ 125°C", Tolerance=±20%, Package / Case="Inductor 4.7µH SMD 3x3.2mm", SCDType=source, Supplier 1=Digi-Key, Type="Ferrite Core"
6: library part LM2596S-5.0, Package=None, Availability=Unavailable, MP=LM2596S-5.0, Price=None
8 9 11 12 13 14 15 16 17 18 20 21 22 23 24 25 26 27 28 29 30 31 32 33 35 36 37 38 39 40 41 42 43 44 45 46 48 49 50 51 52 54 55 56 57 58 59 61 62 63 65 66 67 68 69 72 73 74 76: library part "RES 1206 0.25W", "RES 1206", Data=16-12-2016, Desc.="RES SMD 1206", Designer="Abbas Basereh"
19: library part CURRENT-ACS712ELCTR-05B-T(SOIC8-5X4MM), "Current Sensor 5A 1 Channel Hall Effect, Open Loop Bidirectional 8-SOIC _0.154, 3.90mm Width_", Package="SOIC-8 Allegro MicroSystems LLC", Availability=Unavailable, MF=Allegro, MP=ACS712ELCTR-05B-T, Price=None, SnapEDA_Link=https://www.snapeda.com/parts/ACS712ELCTR-05B-T/Allegro%20Industries/view-part/217679/?ref=snap
ams1 ams2 ams3: library part LM1117IMP-x.x, "x.x Volt, 800mA Low-Dropout Linear Regulator, 4-pin SOT-223", Manufacturer="National Semiconductor", PackageTopMarking=XYTT*N05B, PartNumber=LM1117IMP-3.3, PowerWise=N, Supplier Part Number 1=7614123, Code_IPC=SOT223-4, Code_JEDEC=TO-261-AA, ComponentLink1Description="LM1117 Datasheet", ComponentLink1URL=http://www.national.com/ds/LM/LM1117.pdf, ComponentLink2Description="LM1117 Web Page", ComponentLink2URL=http://www.national.com/pf/LM/LM1117.html, ComponentLink3Description="MP04A Package Page", ComponentLink3URL=http://www.national.com/packaging/folders/mp04a.html, CompType="LDO IC", DatasheetVersion=Apr-2006, PackageDescription="Molded SOT-223, 6.50 x 3.56 x 1.6mm Body, 4 Lead, 2.3mm Pitch", PackageReference=MP04A, PackageVersion="revB, Apr-2003", PinCount=4, Published=4-Dec-2008, Publisher="Altium Limited", RoHS=N, Supplier 1=Farnell
BC1 BC2 BC3 BC4 BC5 BC6 BC7 BC8 BC9 BC11 BC12 BC14 BC15 BC16: "45 V, 500 mA NPN general-purpose transistors", ComponentLink1Description="Manufacturer Link", ComponentLink1URL=http://www.nxp.com/, ComponentLink2Description=Datasheet, ComponentLink2URL=http://www.nxp.com/, DatasheetVersion=2017, LatestRevisionDate=2017, LatestRevisionNote="IPC-7351 Footprint Added.", PackageDescription="3-Pin SOT-23 Package 0.95 mm Pitch, 2.3 mm Lead Span", PackageReference=SOT23, PackageVersion=2017-2-8, Published=2017-2-8, Publisher="Abbas Basereh"
BC10 BC13: "PNP General-purpose Transistor", LatestRevisionDate=29-May-2009, LatestRevisionNote="IPC-7351 Footprint Added.", PackageDescription="3-Pin SOT-23 Package 0.95 mm Pitch, 2.4 mm Lead Span", PackageReference=SOT-23B, PackageVersion=Aug-1999, Published=8-Jun-2000, Publisher="Altium Limited"
buzzer1 buzzer2 In+1 Inbutton1 Inbutton2 Inbutton3 Inbutton4 led1 led2 pinIN1: library part "Header 2", "Header, 2-Pin", LatestRevisionDate=17-Jul-2002, LatestRevisionNote="Re-released for DXP Platform.", Publisher="Altium Limited"
D1 D2 D4: library part "LED SMD PACKAGE", "SMD Mono-color Chip LED Waterclear", Forward Voltage="3.2 V", Part Number=150080BS75000, Peak Wavelength="465 nm", Published Date="Jan 2017", Publisher="Ali Hafizi"
D3 D14: Package=None, Availability=Unavailable, MP=SS14, Price=None
D5 D6 D7 D8 D9 D10 D11 D12 D13: library part "1N4148 SMD", "General Semicoductor"
Din1 ss1: library part "Diode DIP Package", "Diode DIP Package", Code_JEDEC=DO-204-AH, ComponentLink1Description="Manufacturer Link", ComponentLink1URL=http://www.fairchildsemi.com/, ComponentLink2Description=Datasheet, ComponentLink2URL=http://www.fairchildsemi.com/ds/1N%2F1N4148.pdf, DatasheetVersion=1997, LatestRevisionDate=17-Jul-2002, LatestRevisionNote="Re-released for DXP Platform.", PackageDescription="Diode, Axial; Body 3.8 x 1.9 mm (LxDia. max), Lead Dia. 0.53 mm (max)", Published=8-Jun-2000, Publisher="Altium Limited"
DZ1 DZ2 DZ3: library part "ZENER GENERAL DIODE", "DIODE ZENER GENERAL", ComponentLink1Description="Manufacturer Link", ComponentLink2Description=Datasheet, PackageDescription="DIODE GEN ZENER", PackageReference="DO 35", PackageVersion=2017-1-12, Published=2017-1-12, Publisher="Abbas Basereh"
L1: "Radial Coil Inductor", Package=None, Availability="In Stock", Check_prices=https://www.snapeda.com/parts/DRC-V-391K/Bel+Fuse/view-part/?ref=eda, MF="Bel Fuse", MP=DRC-V-391K, Price=None, Purchase-URL=https://pricing.snapeda.com/search/part/DRC-V-391K/?ref=eda, SnapEDA_Link=https://www.snapeda.com/parts/DRC-V-391K/Bel+Fuse/view-part/?ref=snap
P1: library part "Header 10", "Header, 10-Pin", LatestRevisionDate=17-Jul-2002, LatestRevisionNote="Re-released for DXP Platform.", Publisher="Altium Limited"
P2 P5 P7 P8: library part "Header 4", "Header, 4-Pin", LatestRevisionDate=17-Jul-2002, LatestRevisionNote="Re-released for DXP Platform.", Publisher="Altium Limited"
P3: library part "Header 5X2", "Header, 5-Pin, Dual row", LatestRevisionDate=17-Jul-2002, LatestRevisionNote="Re-released for DXP Platform.", Publisher="Altium Limited"
P4: library part "Header 8", "Header, 8-Pin", LatestRevisionDate=17-Jul-2002, LatestRevisionNote="Re-released for DXP Platform.", Publisher="Altium Limited"
P6: library part "Header 3", "Header, 3-Pin", LatestRevisionDate=17-Jul-2002, LatestRevisionNote="Re-released for DXP Platform.", Publisher="Altium Limited"
Q1: library part IRF3205PBF, "N-Channel 55V 110A _Tc_ 200W _Tc_ Through Hole TO-220AB", Package="TO-220 International Rectifier", Availability=Unavailable, MF="Infineon Technologies", MP=IRF3205PBF, Price=None, SnapEDA_Link=https://www.snapeda.com/parts/IRF3205PBF/Infineon%20Technologies/view-part/98571/?ref=snap
rele1 rele2 rele3 rele4 rele11: library part "RELAY General", "Relay_SPDT POWER NEEDLE", Company=E.P.I.L, Design_Date=2011/10/31, Designer="Ali Hafizi"
rele5 rele6 rele7 rele8 rele9 rele10: library part V23105A5301A201, "Industrial Control, Relays, I/O Modules, spdt, relay, Relays and Accessories", Package=None, Check_prices=https://www.snapeda.com/parts/V23105-A5301-A201/TE+Connectivity+Potter+%2526+Brumfield+Relays/view-part/?ref=eda, MF="TE Connectivity", MP=V23105-A5301-A201, SnapEDA_Link=https://www.snapeda.com/parts/V23105-A5301-A201/TE+Connectivity+Potter+%2526+Brumfield+Relays/view-part/?ref=snap
U1: library part LM358DRG3, "Dual, 30-V, 700-kHz operational amplifier", Package="SOIC-8 Texas Instruments", Check_prices=https://www.snapeda.com/parts/LM358DRG3/Texas+Instruments/view-part/?ref=eda, MF="Texas Instruments", MP=LM358DRG3, SnapEDA_Link=https://www.snapeda.com/parts/LM358DRG3/Texas+Instruments/view-part/?ref=snap
U2: library part TC4420CPA, "Microchip MOSFET Power Driver 6A 4.5 to 18V Non-Inverting 8-Pin PDIP", Package="DIP-8 Microchip", Check_prices=https://www.snapeda.com/parts/TC4420CPA/Microchip/view-part/?ref=eda, MF=Microchip, MP=TC4420CPA, SnapEDA_Link=https://www.snapeda.com/parts/TC4420CPA/Microchip/view-part/?ref=snap
U3: "ARM® Cortex®-M3 STM32F1 Microcontroller IC 32-Bit 72MHz 512KB (512K x 8) FLASH 64-LQFP (10x10)", Package="LQFP-64 STMicroelectronics", Check_prices=https://www.snapeda.com/parts/STM32F103RET6/STMicroelectronics/view-part/?ref=eda, MF=STMicroelectronics, MP=STM32F103RET6, SnapEDA_Link=https://www.snapeda.com/parts/STM32F103RET6/STMicroelectronics/view-part/?ref=snap
U4: "1/1 Приемопередатчик Половина CANbus 8-SO", Package="SO-8 NXP Semiconductors", Availability="In Stock", Check_prices=https://www.snapeda.com/parts/TJA1051T/3/NXP+USA+Inc./view-part/?ref=eda, MF="NXP USA", MP=TJA1051T/3, Price=None, Purchase-URL=https://pricing.snapeda.com/search/part/TJA1051T/3/?ref=eda, SnapEDA_Link=https://www.snapeda.com/parts/TJA1051T/3/NXP+USA+Inc./view-part/?ref=snap
Y1: library part CRYSTAL, "Crystal"

## Via types
v1: diameter 1, hole 0.5, Top Layer to Bottom Layer, 140 vias
v2: diameter 1.5, hole 1, Top Layer to Bottom Layer, 15 vias
v3: diameter 0.8, hole 0.5, Top Layer to Bottom Layer, 12 vias
v4: diameter 1.27, hole 0.711, Top Layer to Bottom Layer, 6 vias
v5: diameter 2, hole 1, Top Layer to Bottom Layer, 5 vias
v6: diameter 1.5, hole 0.5, Top Layer to Bottom Layer, 3 vias
v7: diameter 1.4, hole 0.5, Top Layer to Bottom Layer, 2 vias
v8: diameter 0.9, hole 0.5, Top Layer to Bottom Layer, 2 vias
v9: diameter 1.2, hole 0.5, Top Layer to Bottom Layer, 1 vias

## Nets (pads, with @x,y where several pads share a name; then routed paths per layer and width w, separated by ;. In a path a pad name is that pad's centre, name@x,y a point inside that pad or via, vN(x,y) a via of type N, cw(c..) or ccw(c..) an arc to the next point about the centre after c; other vN are vias at no path point)
3.3ads: 34.1 40.1 65.2 67.2 ams2.2 ams2.4 C2.1 P1.1 P2.2 | length 53.9
  Top Layer w0.5: v4(84.074,120.777) 84.074,108.407 84.684,107.798 ; P1.1@92.989,116.129 95.098,116.129 97.13,114.097 34.1@97.13,107.903
  Top Layer w1: P2.2@80.01,106.299 82.347,106.299 C2.1@82.956,106.909 ; C2.1@82.906,106.401 84.303,107.798 84.684,107.798 ; 84.633,107.848 ams2.4@86.787,107.798 ams2.2@92.587,107.798 97.024,107.798 34.1@97.13,107.903
  Bottom Layer w1: v4(84.074,120.777) 84.074,129.901 40.1@85.674,131.502
+: rele5.8 rele6.4 | length 18.5
  Bottom Layer w1: rele5.8@125.603,209.838 128.05,207.391 131.775,207.391 133.325,205.842 133.325,202.565 136.085,199.805 rele6.4@138.049,199.805
+5v: 1.1 2.1 3.2 6.4 25.2 41.2 ams1.3 ams2.3 ams3.3 BC13.2 D5.2 D6.2 D7.2 D8.2 D9.2 D10.2 D11.2 D12.2 D13.2 D14.C rele1.5 rele2.5 rele3.5 rele4.5 rele5.16 rele6.16 rele7.16 rele8.16 rele9.16 rele10.16 rele11.5 U2.1 U2.8 | length 547.5
  Top Layer w0.5: BC13.2@112.786,152.901 113.241,152.901 v1(113.944,152.197) ; D13.2@136.371,143.789 D13.2@136.576,143.789 ; v1(143.231,130.632) 143.586,130.988 152.07,130.988 153.619,129.438 153.619,127.432 154.33,126.721 156.083,126.721
  Top Layer w0.7: 25.2@110.134,206.203 110.134,196.775 rele4.5@113.278,193.632 ; D13.2@136.576,143.789 139.675,146.888 rele11.5@139.675,149.327 ; 156.083,126.721 158.039,124.765
  Top Layer w0.9: 77.368,89.027 77.368,162.89
  Top Layer w1: v5(70.942,186.665) 61.29,177.013 61.29,168.732 66.269,163.754 76.505,163.754 77.368,162.89 ; rele1.5@71.222,193.878 73.939,196.596 82.646,196.596 rele2.5@85.363,193.878 ; 77.368,89.027 79.299,87.097 86.335,87.097 ; 77.368,100.279 87.757,100.279 89.56,102.083 v2(89.56,102.591) ; ams3.3@85.18,89.734 85.18,88.251 86.335,87.097 ; 3.2@116.916,90.373 118.085,90.373 119.763,92.051 6.4@124.842,92.051 ; U2.1@117.831,145.798 117.831,147.295 118.847,148.311 126.619,148.311 128.295,146.634 128.295,143.535 130.581,141.249 134.747,141.249 136.371,142.873 D13.2@136.371,143.789 ; v1(133.985,101.727) 133.299,101.041 111.887,101.041 108.356,97.511 2.1@108.356,95.095 106.042,95.095 102.173,91.225 ams1.3@102.173,89.962 102.173,88.203 101.067,87.097 86.335,87.097 ; rele11.5@139.675,149.327 140.157,149.809 148.412,149.809 149.606,148.615 v1(149.606,146.558) 147.803,144.755 147.803,142.621 v1(143.18,137.998) ; v1(144.526,102.616) 149.555,102.616 158.039,111.1 158.039,124.765 ; rele10.16@156.439,178.791 v4(156.439,185.623)
  Bottom Layer w0.25: v1(143.18,137.998) v1@143.231,137.947
  Bottom Layer w0.3: v1(143.231,130.632) v1@143.231,137.947
  Bottom Layer w0.5: rele6.16@130.429,192.185 130.429,190.604 D8.2@131.65,189.382 ; rele7.16@142.621,192.202 142.621,190.248 D9.2@143.664,189.205 ; rele8.16@155.067,192.075 155.067,190.324 D10.2@156.11,189.281 156.439,188.953 v4(156.439,185.623) ; rele10.16@156.439,178.791 156.591,178.638 D12.2@156.591,176.733 ; rele9.16@167.64,192.075 167.64,189.892 D11.2@168.328,189.205
  Bottom Layer w0.6: v1(133.985,101.727) 143.637,101.727 v1(144.526,102.616)
  Bottom Layer w0.8: rele2.5@85.363,194.863 87.452,196.952 95.944,196.952 rele3.5@99.26,193.636 101.839,196.215 110.695,196.215 rele4.5@113.278,193.632
  Bottom Layer w1: v5(70.942,186.665) 70.942,193.599 rele1.5@71.222,193.878 ; D5.2@82.345,188.443 82.956,188.443 85.363,190.85 rele2.5@85.363,193.878 rele2.5@85.363,194.863 ; v2(89.56,102.591) 89.56,108.991 90.678,110.109 v2(93.701,110.109) ; 2.1@108.356,95.095 109.861,95.095 1.1@110.312,94.644 114.499,94.644 116.916,92.227 v2(116.916,89.84) ; D6.2@110.132,188.163 110.998,188.163 113.278,190.443 rele4.5@113.278,193.632 116.409,193.632 rele5.16@117.983,192.058 ; v1(113.944,152.197) 113.944,152.629 114.984,153.668 U2.8@117.831,153.668 U2.1@117.831,145.798 ; D7.2@119.761,189.23 119.761,190.28 rele5.16@117.983,192.058 ; rele6.16@130.429,192.185 130.429,194.488 ; 142.469,194.488 142.621,194.335 rele7.16@142.621,192.202 ; 155.016,194.488 155.067,194.437 rele8.16@155.067,192.075 ; rele9.16@167.64,192.075 165.227,194.488 130.429,194.488 ; rele5.16@117.983,192.058 120.413,194.488 130.429,194.488
+12in: 6.1 10.2 35.2 54.1@156.921,104.755 63.2 BC10.2 C1.1 Din1.2 rele3.3 | length 322.1
  Top Layer w0.7: v1(97.511,188.062) 96.977,188.595 96.977,201.353 rele3.3@99.26,203.636
  Top Layer w1: v1(76.327,177.038) 77.394,178.105 86.157,178.105 91.364,183.312 v1(91.364,183.388) ; v5(100.178,209.956) 105.156,214.935 177.368,214.935 178.308,213.995 178.308,166.243 176.301,164.236 160.96,164.236 159.944,163.22 159.944,103.607 158.369,102.032 v5(157.353,102.032)
  Bottom Layer w0.25: 63.2@145.734,113.538 63.2@146.126,113.146 ; v5@156.921,102.464 v5(157.353,102.032)
  Bottom Layer w0.5: 35.2@75.469,175.616 75.469,176.023 BC10.2@76.484,177.038 v1(76.327,177.038) ; v1(91.364,183.388) v1@91.364,183.617 ; v5@156.921,102.464 54.1@156.921,104.755
  Bottom Layer w0.6: 63.2@146.126,113.146 146.126,101.545 10.2@148.561,99.111
  Bottom Layer w0.7: v1@91.364,183.617 92.481,184.734 96.164,184.734 97.511,186.08 v1(97.511,188.062)
  Bottom Layer w1: rele3.3@99.26,203.636 99.26,209.039 v5(100.178,209.956) ; v2(123.165,97.866) 123.52,98.222 140.157,98.222 Din1.2@142.9,95.479 142.9,95.91 144.12,97.13 C1.1@148.209,97.13 148.561,97.481 10.2@148.561,99.111 148.561,100.606 149.987,102.032 v5(157.353,102.032)
ads: 39.2 40.2 rele8.6 | length 143.5
  Top Layer w0.5: 117.119,161.696 117.119,162.027
  Top Layer w1: v1(99.949,145.364) 106.096,151.511 106.096,154.711 111.684,160.299 115.722,160.299 117.119,161.696 ; 117.119,162.027 117.119,175.311 121.031,179.222 v1(128.372,179.222) ; v1(140.614,180.213) 141.656,180.213 144.856,183.413 144.856,196.367 v1(144.018,197.206)
  Bottom Layer w0.5: 40.2@85.674,135.402 85.801,135.275 39.2@88.798,135.275 ; 94.932,145.123 95.174,145.364 ; rele8.6@162.687,204.775 163.627,204.775 166.116,202.286 168.148,202.286 169.799,200.635 169.799,197.866 168.504,196.571
  Bottom Layer w0.6: v1(144.018,197.206) 144.653,196.571 168.504,196.571
  Bottom Layer w1: 39.2@88.798,135.275 88.798,138.989 94.932,145.123 ; 95.174,145.364 v1(99.949,145.364) ; v1(128.372,179.222) 139.624,179.222 v1(140.614,180.213)
freq: 12.2 rele7.6 | length 33.1
  Top Layer w1: 12.2@149.854,174.625 149.854,178.441 146.66,181.635 146.66,201.32 rele7.6@150.241,204.902
GND: 1.2 2.2 4.2 5.1 6.3 6.5 6.6 7.2 10.1 11.1 17.2 18.2 19.5 20.2 34.2 42.1 43.1 44.1 52.1 53.2 54.2@108.567,119.079 55.2@124.007,129.972 56.2 57.1 60.1 64.1 70.1 71.2 76.2 ams1.1 ams2.1 ams3.1 BC1.2 BC2.2 BC3.2 BC4.2 BC5.2 BC6.2 BC7.2 BC8.2 BC9.2 BC11.2 BC12.2 BC14.2 BC15.2 BC16.2 C1.2 C2.2 C3.2 ca1.1 ca2.1 D2.1 D4.1 DZ1.1 DZ2.1 DZ3.1 In+1.2 led1.2 led2.2 P1.2 P2.1 P3.2 P5.4 P6.3 P7.4 P8.4 Q1.3 rele5.11 rele6.11 rele7.11 rele8.11 ss1.1 U1.2 U1.4 U2.4 U2.5 U3.12 U3.18 U3.31 U3.47 U3.63 U4.2 | length 1204.7
  Top Layer w0.25: 113.591,122.989 U3.12@119.4,122.989 122.329,122.989 122.885,123.546 122.885,125.247 121.82,126.313 U3.63@121.82,130.409 121.82,132.231 v1(121.691,132.359) ; U3.18@121.82,119.069 121.82,122.988 ; v1(126.619,125.552) 126.619,127.305 127.304,127.989 U3.47@130.74,127.989 ; v1(126.797,122.809) 127.305,122.809 128.32,121.794 ; BC16.2@143.962,115.367 144.501,115.367
  Top Layer w0.3: U3.31@128.32,119.069 128.32,121.794
  Top Layer w0.4: 108.42,117.818 113.591,122.989
  Top Layer w0.5: 77.8,209.118 78.515,208.403 ca1.1@81.153,208.403 ; 70.1@83.003,152.455 83.998,151.46 ; v1(88.443,189.027) 90.856,186.614 112.293,186.614 v1(113.919,188.239) ; D2.1@92.287,174.6 94.869,174.6 95.682,175.412 99.894,175.412 100.051,175.256 100.051,169.647 99.593,169.189 U1.4@97.479,169.189 v1(97.225,168.935) ; P1.2@92.989,118.669 96.368,118.669 99.847,115.189 99.847,106.248 98.802,105.203 34.2@97.13,105.203 ; U1.2@97.479,171.729 99.847,171.729 ; 7.2@99.844,175.463 99.844,176.679 100.152,176.987 103.734,176.987 ; 101.346,103.353 101.346,110.744 108.42,117.818 104.826,121.412 v1(104.826,123.393) ; v1(106.401,180.492) 106.401,179.299 105.842,178.74 DZ3.1@103.86,178.74 103.86,177.113 103.734,176.987 ; DZ2.1@107.365,165.202 109.296,165.202 110.007,165.913 110.007,169.037 109.237,169.808 107.925,169.808 107.925,174.498 105.435,176.987 103.734,176.987 ; BC15.2@113.929,145.406 113.929,142.331 115.926,140.335 123.876,140.335 125.451,141.91 U2.4@125.451,145.798 ; 142.215,100.711 142.215,105.867 144.501,108.153 144.501,115.367 ; BC16.2@143.962,115.367 146.761,118.166 146.761,123.749 148.057,125.044 P7.4@149.174,125.044 149.301,125.171 P8.4@155.397,125.171
  Top Layer w0.6: 83.998,151.46 U4.2@86.58,151.46 ; v3(155.423,161.214) 156.667,159.969 P5.4@156.667,148.92
  Top Layer w0.7: v1(128.422,187.3) 128.422,181.864 129.794,180.492 129.794,177.775 v1(129.286,177.267) ; 136.068,171.687 BC1.2@144.084,171.687
  Top Layer w0.8: 98.247,100.254 101.346,103.353
  Top Layer w1: v2(61.57,184.302) 61.57,185.369 64.948,188.747 88.163,188.747 v1(88.443,189.027) ; P2.1@80.01,103.759 80.035,103.784 82.982,103.784 C2.2@83.007,103.81 ; v1(86.792,168.859) 87.554,168.097 v1(87.554,162.433) ; v2(92.583,105.156) 92.63,105.203 34.2@97.13,105.203 ; v2(97.573,88.81) 94.073,88.81 4.2@91.313,91.57 90.167,91.57 89.078,92.659 89.078,97.765 91.567,100.254 98.247,100.254 ; rele5.11@117.983,204.758 117.983,206.273 119.126,207.416 130.302,207.416 ; v1(124.358,187.3) v1(128.422,187.3) ; 6.3@124.842,93.751 6.6@135.592,93.751 135.592,95.384 140.919,100.711 ; 52.1@127.076,170.547 124.677,170.547 122.911,172.314 122.911,175.006 125.171,177.267 v1(129.286,177.267) ; rele6.11@130.429,204.885 130.429,207.289 130.302,207.416 ; 44.1@135.173,174.498 136.068,173.603 136.068,171.687 ; v1(137.074,187.188) 139.603,184.658 v1(142.24,184.658) ; 141.097,100.711 142.215,100.711 150.571,100.711 151.709,99.573 C1.2@151.709,97.13 ; rele7.11@142.621,204.902 142.621,207.239 142.799,207.416 ; v1(148.471,185.478) 150.622,187.63 v1(161.823,187.63) 174.168,187.63 v1(174.371,187.427) ; rele8.11@155.067,204.775 155.067,207.188 154.838,207.416 142.799,207.416 ; led2.2@155.296,128.27 led2.2@155.296,128.473 155.296,129.946 P6.3@157.201,131.851 ; 130.302,207.416 142.799,207.416
  Bottom Layer w0.25: v1@113.767,133.071 v1(113.868,132.969) ; v1(128.422,187.3) 136.499,187.3 ; v1(137.074,187.188) BC5.2@137.074,187.875 ; 159.715,148.92 159.842,149.047
  Bottom Layer w0.4: v3(155.423,161.214) 155.844,161.635 BC9.2@155.844,167.428
  Bottom Layer w0.5: BC14.2@73.67,179.866 73.67,183.576 76.022,185.928 81.763,185.928 82.474,185.217 ; ca2.1@73.736,209.521 74.418,208.839 v1(77.114,208.839) ; v2@82.728,152.375 76.2@87.153,152.375 ; 92.431,100.025 115.468,100.025 117.018,101.575 P3.2@117.018,104.724 117.039,104.746 53.2@118.974,104.746 ; 18.2@96.942,165.801 18.2@97.225,165.518 ; v1(113.868,132.969) 114.021,133.121 120.929,133.121 v1(121.691,132.359) ; v1(119.786,140.437) 119.786,134.264 v1(121.691,132.359) ; 55.2@124.007,129.972 125.679,129.972 125.933,130.226 ; 42.1@124.226,149.657 125.451,149.657 ; v1(126.797,122.809) 126.797,129.718 124.155,132.359 v1(121.691,132.359) ; v1(136.068,171.069) 136.576,171.577 17.2@141.941,171.577 ; v1(148.471,185.478) 149.291,186.299 BC6.2@149.291,188.129
  Bottom Layer w0.6: 61.153,185.496 BC2.2@61.153,190.161
  Bottom Layer w0.7: 126.415,145.798 BC11.2@128.388,143.825
  Bottom Layer w0.8: 61.153,170.292 61.153,185.496
  Bottom Layer w1: 61.153,170.292 63.779,167.665 75.59,167.665 77.292,165.964 77.292,152.629 ; P2.1@80.01,103.759 81.813,101.956 81.813,100.025 ; v2(80.315,89.865) 80.315,98.527 81.813,100.025 ; v2@80.449,89.865 80.449,87.554 81.432,87.554 ; v1(81.153,208.559) 83.21,208.559 84.684,210.033 84.684,212.395 87.274,214.986 113.843,214.986 113.843,208.898 rele5.11@117.983,204.758 ; v2@82.601,152.375 81.89,152.375 81.636,152.629 77.292,152.629 ; Q1.3@82.779,180.975 82.779,183.179 43.1@82.316,183.642 82.474,183.8 82.474,185.217 82.474,185.547 85.573,185.547 88.443,188.417 v1(88.443,189.027) ; 71.2@83.261,151.108 83.261,151.841 82.728,152.375 v2(82.601,152.502) 82.601,157.48 v1(87.554,162.433) ; v1(86.792,168.859) 86.792,175.844 93.644,182.696 11.1@96.469,182.696 104.832,182.696 106.401,181.127 v1(106.401,180.492) ; C3.2@87.63,91.872 87.932,91.57 4.2@91.313,91.57 92.869,91.57 5.1@93.396,92.097 ; v2(92.583,105.156) 92.583,100.178 92.431,100.025 81.813,100.025 ; v1(94.488,166.092) 96.652,166.092 18.2@96.942,165.801 ; v1(97.225,168.935) 97.225,165.518 18.2@97.288,165.456 ; v2(97.573,88.81) 97.573,87.554 ; 64.1@104.924,123.622 60.1@104.924,128.549 ; 1.2@110.312,91.944 109.963,91.595 2.2@108.356,91.595 ; v1(113.919,188.239) 115.9,186.258 123.315,186.258 v1(124.358,187.3) ; 114.097,214.986 163.424,214.986 ; U2.5@125.451,153.668 125.451,149.657 U2.4@125.451,145.798 126.415,145.798 ; v1(128.422,187.3) 128.535,187.188 v1(137.074,187.188) ; v1(129.286,177.267) 133.579,177.267 136.068,174.777 v1(136.068,171.069) 141.433,171.069 17.2@141.941,171.577 ; v2(135.56,93.421) 133.477,91.338 ss1.1@130.429,91.338 129.413,90.322 v2(122.326,90.322) 122.326,89.814 119.786,87.274 112.573,87.274 108.356,91.491 2.2@108.356,91.595 ; v1(142.24,184.658) 147.65,184.658 v1(148.471,185.478) ; P7.4@149.174,125.044 led1.2@149.174,128.346 ; 10.1@151.261,99.111 151.486,98.886 151.486,97.353 C1.2@151.709,97.13 153.695,97.13 In+1.2@156.388,94.945 ; led2.2@155.296,128.473 155.296,125.273 P8.4@155.397,125.171 ; In+1.2@156.337,94.488 157.963,94.488 159.842,96.368 159.842,112.928 ; 57.1@156.87,112.872 159.786,112.872 159.842,112.928 ; P5.4@157.302,148.92 159.715,148.92 ; 163.449,214.986 177.241,214.986 178.359,213.868 178.359,166.294 176.301,164.236 160.833,164.236 159.842,163.246 159.842,149.047 159.842,112.928 ; 77.292,152.629 77.292,88.849 78.588,87.554 81.432,87.554 ; 81.432,87.554 97.573,87.554 ; 97.573,87.554 104.315,87.554 2.2@108.356,91.595
in1: 13.2 22.2 rele5.6 | length 45.5
  Top Layer w1: 13.2@96.444,182.696 115.793,182.696 121.615,188.519 121.615,200.77 rele5.6@125.603,204.758
Net3_1: 3.1 6.2 ss1.2 | length 14.2
  Top Layer w1: 3.1@116.688,96.444 117.678,95.453 v2(122.352,95.453)
  Bottom Layer w1: v2(122.352,95.453) 122.377,95.428 130.26,95.428 ss1.2@130.429,95.258
Net8_1: 8.1 14.1 U1.1 | length 7
  Top Layer w0.5: v1(93.675,171.856) 94.513,171.856 95.656,172.999 U1.1@97.479,172.999
  Bottom Layer w1: 8.1@93.085,171.882 14.1@93.085,174.6
Net8_2: 8.2 D1.1 | length 1.2
  Top Layer w0.5: v1(88.951,171.78) D1.1@90.187,171.78
Net12_1: 12.1 17.1 BC1.1 | length 3.4
  Top Layer w0.5: 12.1@145.954,174.625 145.984,174.595 BC1.1@145.984,171.687
  Bottom Layer w0.5: 17.1@145.841,171.577 v1(146.279,171.577)
Net14_2: 14.2 D2.2 | length 1.1
  Top Layer w0.5: v1(89.103,174.6) D2.2@90.187,174.6
Net15_1: 15.1 21.1 U1.7 | length 3.4
  Top Layer w0.5: U1.7@102.419,171.729 102.476,171.673 21.1@105.689,171.673
  Bottom Layer w0.5: 15.1@105.715,171.673 v1(105.715,171.78)
Net16_1: 16.1 18.1 U1.5 | length 4.2
  Bottom Layer w1: v1(101.188,165.258) 102.565,166.636 v1(102.565,168.885)
Net19_1: 19.1 19.2 pinIN1.1 | length 5.2
  Top Layer w0.5: 19.2@71.036,211.658 71.036,212.42
  Top Layer w1: pinIN1.1@67.208,212.42 71.222,212.42 71.222,212.225 71.036,212.039
Net19_3: 19.3 19.4 rele1.1 | length 21.7
  Top Layer w1: rele1.1@66.272,191.428 66.272,206.886 68.809,209.423 70.782,209.423 19.3@70.782,210.134
Net19_6: 19.6 ca1.2 | length 5.1
  Top Layer w0.5: 19.6@76.436,210.388 78.715,210.388 79.43,211.103 ca1.2@81.204,211.103
Net20_1: 20.1 Inbutton2.2 rele9.11 | length 23.9
  Top Layer w0.7: rele9.11@167.64,204.775 165.202,207.213 165.202,211.607 166.472,212.877 Inbutton2.2@169.926,212.877
  Bottom Layer w0.5: rele9.11@167.386,204.775 167.386,204.521 173.361,198.546 20.1@173.361,196.418
Net21_2: 21.2 D4.2 | length 2.3
  Top Layer w0.5: 21.2@105.689,167.773 105.755,167.708 D4.2@107.925,167.708
Net22_1: 22.1 D3.C DZ3.2 | length 0.2
  Bottom Layer w1: v5(99.72,178.714) D3.C@99.942,178.714
Net24_1: 24.1 Inbutton2.1 rele9.6 | length 23.7
  Top Layer w1: rele9.6@174.904,204.775 rele9.6@175.006,204.775 rele9.6@175.26,204.775
  Bottom Layer w0.25: 172.237,210.541 172.466,210.769
  Bottom Layer w0.4: 162.433,212.801 167.64,212.801 169.901,210.541 172.237,210.541
  Bottom Layer w0.5: v6(159.557,212.801) 162.433,212.801 ; rele9.6@175.057,204.826 175.108,204.775 rele9.6@175.26,204.775
  Bottom Layer w0.7: Inbutton2.1@172.466,212.877 172.466,210.769 172.466,207.315 rele9.6@175.006,204.775
Net26_1: 26.1 BC2.1 | length 2.3
  Bottom Layer w0.5: 26.1@63.023,187.376 BC2.1@63.023,189.704
Net27_1: 27.1 BC3.1 | length 1.8
  Bottom Layer w0.5: BC3.1@90.145,189.286 90.145,188.067 27.1@90.582,187.63